# EAGLE board SAMD21_GW_M0-MINI-1591_V04 (EAGLE 8.5.1)

Size 93.9 x 43.83 mm. Coordinates in mm from the lower left corner, seen from the top.
Outline: 0,36.02 3.85,36.02 arc90 7.85,40.02 7.85,43.83 86.05,43.83 86.05,40.02 arc90 90.05,36.02 93.9,36.02 93.9,7.82 90.05,7.82 arc90 86.05,3.81 86.05,0 7.85,0 7.85,3.81 arc90 3.85,7.82 0,7.82 0,36.02
Copper layers (1*16): Top 0.035mm / dielectric 1.5mm / Bottom 0.035mm
Design rules "default": minimum track width 6mil, minimum drill 0.35mm, track to track 6mil, track to pad 6mil, pad to pad 6mil, via to via 6mil, smd to smd 6mil, copper to edge 40mil, drill to drill 6mil, minimum pad ring 10mil, minimum via ring 8mil, stop-mask expansion 4mil, vias tented up to drill 0mil, thermal gap 10mil
Net classes: 0 default: width 0.254 mm; 1 PWR: width 0.406 mm
Holes 3 mm at 11.32,6.69 82.58,6.69 82.58,37.14

## Footprints (pad centres in the part's own frame; a part is rotated, then mirrored left to right if it is on the bottom)
1X01 = drill 1.016 octagon: 1 0,0
C1210 = smd 1.6 x 2.7: 1 -1.4,0; 2 1.4,0
C0805 = smd 1.3 x 1.5: 1 -0.95,0; 2 0.95,0
C1206 = smd 1.6 x 1.8: 1 -1.4,0; 2 1.4,0
1812L = smd 2.03 x 3.3: P$1 -2.16,0; P$2 2.16,0
SOT23 = smd 1.016 x 1.143: 1 -0.889,-1.016; 2 0.889,-1.016; 3 0,1.016
557570-1 = drill 0.889: 1-1 -11.43,6.35; 1-2 -10.16,8.89; 1-3 -8.89,6.35; 1-4 -7.62,8.89; 1-5 -6.35,6.35; 1-6 -5.08,8.89; 1-7 -3.81,6.35; 1-8 -2.54,8.89; 2-1 2.54,6.35; 2-2 3.81,8.89; 2-3 5.08,6.35; 2-4 6.35,8.89; 2-5 7.62,6.35; 2-6 8.89,8.89; 2-7 10.16,6.35; 2-8 11.43,8.89 | drill 1.575 pad 2.184: G1 -15.494,-4.572; G3 15.367,-4.572 | hole 3.251: -12.7,0; 12.573,0
1X02 = drill 1.016 long: 1 -1.27,0; 2 1.27,0
SAMD21_M0-MINI = drill 0.6 long: A0 -7.62,-6.35; A1 -7.62,-3.81; A2 -7.62,-1.27; A3 -7.62,1.27; A4 -7.62,3.81; A5 -7.62,6.35; AREF -7.62,11.43; D0/RX 7.62,11.43; D1/TX 7.62,8.89; D2 7.62,6.35; D3 7.62,3.81; D5 7.62,-1.27; D6 7.62,-3.81; D7 7.62,-6.35; D8 7.62,-8.89; D9 7.62,-11.43; D10/SS -7.62,-16.51; D11/MOSI -7.62,-13.97; D12/MISO -7.62,-11.43; D13/SCK -7.62,-8.89; D20/SDA 7.62,-16.51; D21/SCL 7.62,-13.97; GND1 -7.62,13.97; GND2 7.62,16.51; IRQ 7.62,1.27; RST 7.62,13.97; VCC -7.62,8.89; VIN -7.62,16.51
DIL08 = drill 0.813 long: 1 -3.81,-3.81; 2 -1.27,-3.81; 3 1.27,-3.81; 4 3.81,-3.81; 5 3.81,3.81; 6 1.27,3.81; 7 -1.27,3.81; 8 -3.81,3.81
R0805 = smd 1.3 x 1.5: 1 -0.95,0; 2 0.95,0
M0805 = smd 1.3 x 1.6: 1 -0.95,0; 2 0.95,0
SJ = smd 1.168 x 1.6: 1 -0.762,0; 2 0.762,0
SOT223 = smd 1.499 x 2.007: 1 -2.261,-3.15; 2 0.025,-3.15; 3 2.311,-3.15 | smd 3.81 x 2.007: 4 0,3.15
RFM = smd 2.184 x 1.067: ANT 19.651,2.889; DIO0 0,13.27; DIO1 0,11.143; DIO2 0,9.047; DIO3 0,6.889; DIO4 0,4.889; DIO5 0,2.889; GNDA 19.651,4.889; GNDB 19.651,1.048; MISO 19.651,9.047; MOSI 19.651,11.047; NC 19.651,15.334; NSS 19.651,13.206; RESET 0,15.27; SCK 19.651,7.048; VCC 0,1.048
SOIC127P600X175-8N = smd 1.981 x 0.533: 1 -2.464,1.905; 2 -2.464,0.635; 3 -2.464,-0.635; 4 -2.464,-1.905; 5 2.464,-1.905; 6 2.464,-0.635; 7 2.464,0.635; 8 2.464,1.905
MA10-2 = drill 1.016 octagon: 1 -11.43,-1.27; 2 -11.43,1.27; 3 -8.89,-1.27; 4 -8.89,1.27; 5 -6.35,-1.27; 6 -6.35,1.27; 7 -3.81,-1.27; 8 -3.81,1.27; 9 -1.27,-1.27; 10 -1.27,1.27; 11 1.27,-1.27; 12 1.27,1.27; 13 3.81,-1.27; 14 3.81,1.27; 15 6.35,-1.27; 16 6.35,1.27; 17 8.89,-1.27; 18 8.89,1.27; 19 11.43,-1.27; 20 11.43,1.27
RFM69HCW-XXXS2 = smd 3 x 1.2: 3.3V 7.5,1; ANT 7.5,-7; DIO0 7.5,3; DIO1 7.5,5; DIO2 7.5,7; GND_1 7.5,-5; GND_2 -7.5,-7; GND_3 -7.5,7; MISO -7.5,5; MOSI -7.5,3; NSS -7.5,-1; RESET -7.5,-3; SCK -7.5,1
PJ-102A = drill 3 pad 4.8: RING 0.1,-3.39; RING_SW -4.6,-6.29; TIP 0.1,-9.29
SMA_EDGELAUNCH = smd 4.064 x 1.524: GND@1 2.032,-2.54; GND@2 2.032,2.54 | smd 4.064 x 1.524 bottom: GND@3 2.032,2.54; GND@4 2.032,-2.54 | smd 4.064 x 1.27: P 2.032,0
1751264 = drill 1.1 pad 1.7: 1 -5.25,-0.1; 2 -1.75,-0.1; 3 1.75,-0.1; 4 5.25,-0.1

## Placement (x,y rotation side)
ANT1  [1X01]  20.4,2.2 0 top
C1  10uF  [C1210]  85,16.33 0 top
C2  22p  [C0805]  75.27,25.93 0 bottom
C3  0.1uF  [C1206]  85,26.77 180 top
C4  10uF  [C1210]  84.99,16.33 0 bottom
C5  0.1uF  [C1206]  84.98,26.77 180 bottom
F1  1812L  [1812L]  63.79,34.11 0 top
IC1  ATSHA204A  [SOT23]  72.09,8.66 270 top
J2  [557570-1]  24.8,37 180 top
JP19  [1X02]  57.31,8.76 0 top
M0-MINI1  SAM21D_M0-MINI  [SAMD21_M0-MINI]  64.5,21.91 270 top
MAX487  MAX481CPA  [DIL08]  61.68,21.91 0 top
R2  [R0805]  67.76,8.69 0 top
R4  10k  [M0805]  63.39,8.73 0 top
R6  150R  [R0805]  24.9,33.03 0 bottom
R9  330R  [R0805]  71.02,25.93 0 bottom
R10  330R  [R0805]  79.55,25.93 0 bottom
RAW(MYSX)1  open  [SJ]  52.14,2.11 0 top
REG1117_3,3V  REG1117  [SOT223]  85,21.91 270 top
REG1117_5V  REG1117  [SOT223]  85,21.91 270 bottom
RFM69W  RFM69HW  [RFM]  17.53,24.39 270 top
RS1  MAX487ECSA+  [SOIC127P600X175-8N]  48.1,21.91 90 top
SV1  [MA10-2]  67.58,3.6 0 top
U1  RFM69HCW  [RFM69HCW-XXXS2]  25.49,16.28 270 bottom
U$3  2.1MMJACKTHM  [PJ-102A]  74.31,43 0 top
X2  [SMA_EDGELAUNCH]  20.4,0 90 top
X7  1751264  [1751264]  24.8,40.1 0 top

## Library data of the parts
ANT1 JP19 = pinhead
C1-C5 = rcl; SPICEPREFIX: C
F1 = ptc-littlefuse
IC1 = Sensor
J2 = con-amp
M0-MINI1 = SAM21D_M0-MINI_Footprint
MAX487 = maxim-4
R2 R4 R6 R9 R10 = rcl
RAW(MYSX)1 = jumper
REG1117_3,3V REG1117_5V = burr-brown; MPN: REG1117; OC_FARNELL: 1097566; OC_NEWARK: 14P6981
RFM69W = hoperf
RS1 = Maxim_By_element14_Batch_1; MPN: MAX487ECSA+; OC_FARNELL: 9724532; OC_NEWARK: 68K4803; PACKAGE: SOIC-8; SUPPLIER: Maxim
SV1 = con-lstb; OC_FARNELL: unknown; OC_NEWARK: unknown
U1 = doug
U$3 X2 = adafruit
X7 = con-phoenix-350; MPN: 1751264; OC_FARNELL: unknown; OC_NEWARK: 10R0934

## Nets
3V3: SV1.2
5V: C2.2 C4.1 M0-MINI1.VIN R9.1 REG1117_5V.2 RS1.8
A: J2.1-1 J2.2-1 MAX487.6 R6.1 R9.2 RS1.6 X7.2
A0: M0-MINI1.A0 SV1.8
A3: M0-MINI1.A3 SV1.15
A4: M0-MINI1.A4 SV1.16
ANT: ANT1.1 RFM69W.ANT U1.ANT X2.P
B: J2.1-2 J2.2-2 MAX487.7 R6.2 R10.1 RS1.7 X7.3
D3: M0-MINI1.D3 R2.1 SV1.9
D4/IRQ: M0-MINI1.IRQ RFM69W.DIO0 RS1.2 RS1.3 SV1.10 U1.DIO0
D5: M0-MINI1.D5 SV1.11
D6: M0-MINI1.D6 SV1.12
D7/ATSHA: IC1.1 M0-MINI1.D7 SV1.13
D8: M0-MINI1.D8 SV1.14
D10/SS: M0-MINI1.D10/SS R4.1 RFM69W.NSS SV1.20 U1.NSS
D11/MOSI: M0-MINI1.D11/MOSI RFM69W.MOSI SV1.17 U1.MOSI
D12/MISO: M0-MINI1.D12/MISO RFM69W.MISO SV1.18 U1.MISO
D13/SCK: M0-MINI1.D13/SCK RFM69W.SCK SV1.19 U1.SCK
GND [PWR]: C1.2 C2.1 C3.2 C4.2 C5.2 IC1.3 J2.1-6 J2.1-8 J2.2-6 J2.2-8 JP19.1 M0-MINI1.GND1 M0-MINI1.GND2 MAX487.5 R10.2 REG1117_3,3V.1 REG1117_5V.1 RFM69W.GNDA RFM69W.GNDB RS1.5 SV1.4 U1.GND_1 U1.GND_2 U1.GND_3 U$3.RING X2.GND@1 X2.GND@2 X2.GND@3 X2.GND@4 X7.4
IN [PWR]: C3.1 C5.1 F1.P$1 J2.1-3 J2.1-7 J2.2-3 J2.2-7 RAW(MYSX)1.1 REG1117_3,3V.3 REG1117_5V.3 X7.1
N$1: MAX487.2
N$2: J2.1-4
N$3: J2.1-5
N$4: MAX487.3
N$5: M0-MINI1.D9
N$6: J2.2-4
N$7: J2.2-5
N$10: MAX487.1
N$11: MAX487.4
N$12: U1.DIO2
N$13: U1.RESET
N$14: M0-MINI1.D2
N$15: U1.DIO1
N$25: M0-MINI1.A1
N$26: M0-MINI1.A2
N$29: M0-MINI1.A5
RAW: RAW(MYSX)1.2 SV1.1
RESET: M0-MINI1.RST SV1.7
RX: M0-MINI1.D0/RX RS1.1 SV1.6
TX: M0-MINI1.D1/TX RS1.4 SV1.5
VCC [PWR]: C1.1 IC1.2 JP19.2 M0-MINI1.VCC MAX487.8 R2.2 R4.2 REG1117_3,3V.2 RFM69W.VCC SV1.3 U1.3.3V
VIN [PWR]: F1.P$2 U$3.TIP

## Tracks (layer width: path | path; a pad name or v marks a point on that pad's centre or on a via)
5V  (5 unrouted)
A  (6 unrouted)
A0  (1 unrouted)
A3  (1 unrouted)
A4  (1 unrouted)
ANT  (3 unrouted)
B  (6 unrouted)
D3  (2 unrouted)
D4/IRQ  (5 unrouted)
D5  (1 unrouted)
D6  (1 unrouted)
D7/ATSHA  (2 unrouted)
D8  (1 unrouted)
D10/SS  (4 unrouted)
D11/MOSI  (3 unrouted)
D12/MISO  (3 unrouted)
D13/SCK  (3 unrouted)
GND  (29 unrouted)
IN  (10 unrouted)
RAW  (1 unrouted)
RESET  (1 unrouted)
RX  (2 unrouted)
TX  (2 unrouted)
VCC  (10 unrouted)
VIN  (1 unrouted)